# Altium PCB routed.PcbDoc
Units mil, origin at the board's own origin, x right, y up, seen from the top; angles counter-clockwise.
Board outline 1968.5 x 1181.1 mil, 2 copper layers (Top Layer, Bottom Layer); 4 components, 4 nets, 14 pads, 3 vias.
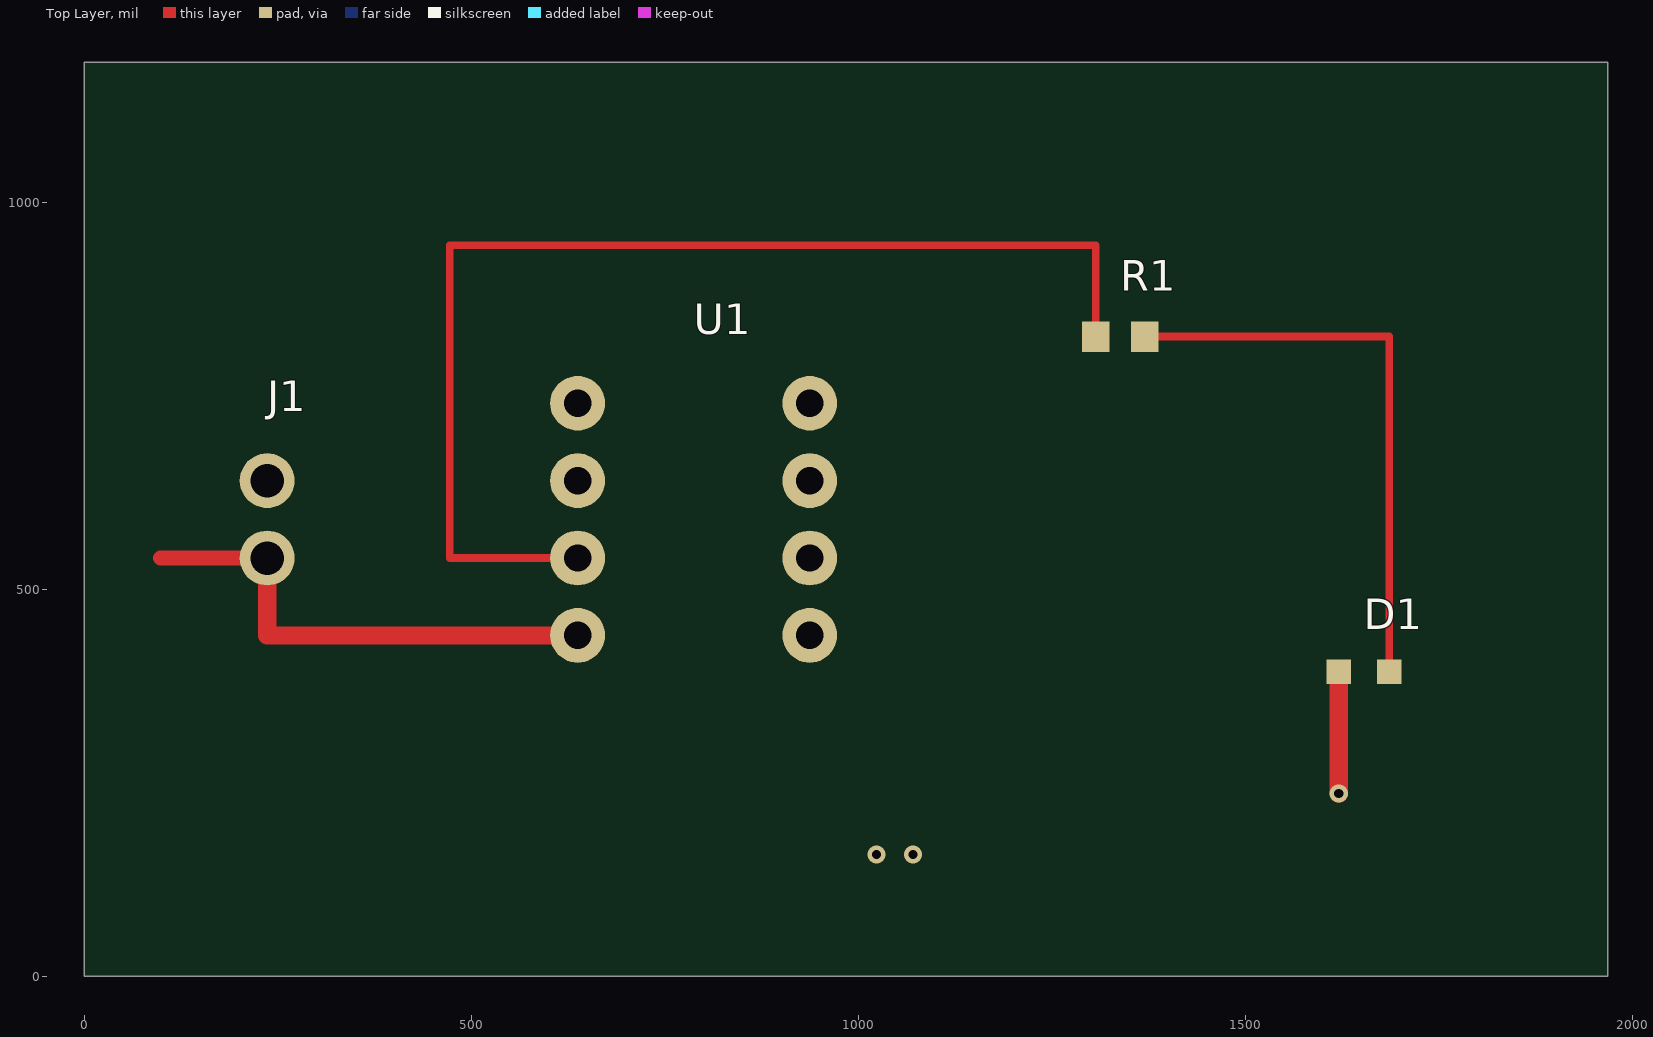
[diagram p0: Top Layer view]
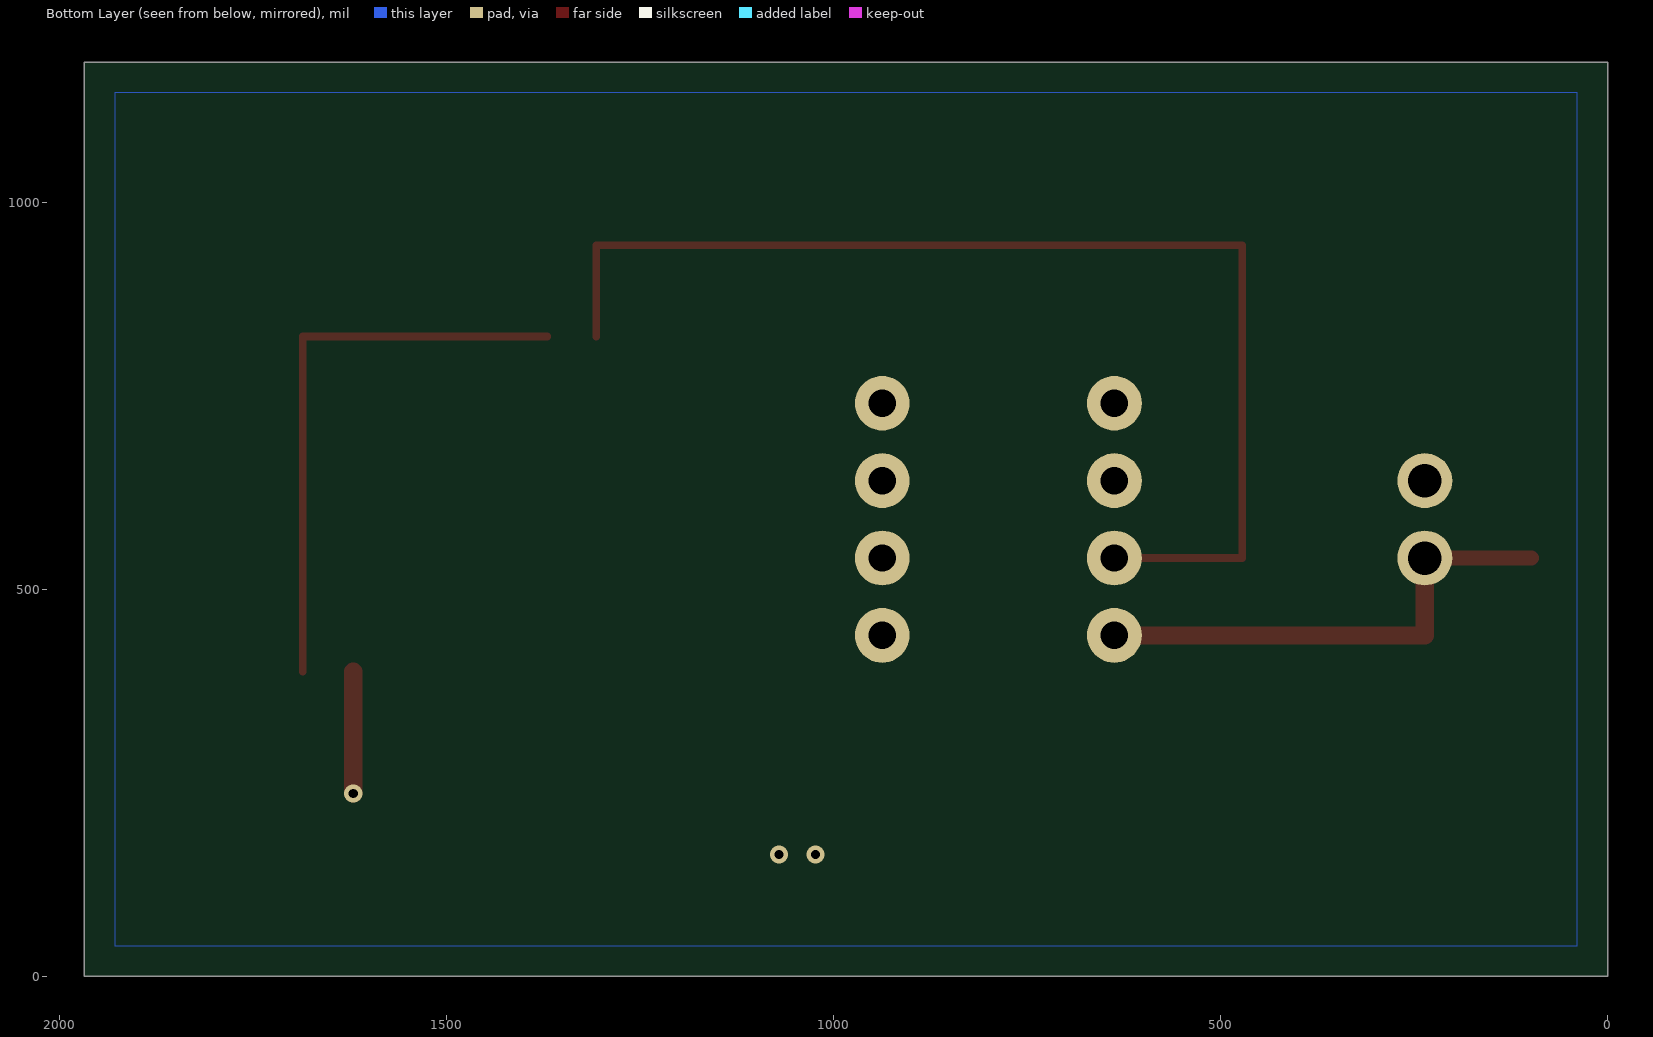
[diagram p1: Bottom Layer view, seen from below]

## Layer stack, top to bottom
Top Solder: solder mask 0.4, Solder Resist, Dk 3.5
Top Layer: signal copper 1.4
Dielectric 1: dielectric 12.6, FR-4, Dk 4.8
Bottom Layer: signal copper 1.4
Bottom Solder: solder mask 0.4, Solder Resist, Dk 3.5

## Board outline
0,1181.1 1968.5,1181.1 1968.5,0 0,0

## Design rules (kind name [scope] priority, off if disabled: settings)
Clearance Clearance_net_VIN_to_net_LED_A [InNet('VIN') vs InNet('LED_A')] p1: gap=59.06 ignorepadtopadclearanceinfootprint=FALSE
Clearance [All] p2: gap=5.91 ignorepadtopadclearanceinfootprint=FALSE
Clearance Clearance_PWR [InNetClass('PWR')] p3: gap=7.87 ignorepadtopadclearanceinfootprint=FALSE
RoutingVias [All] p1: holewidth=11.81 width=23.62 viastyle="Through Hole" minholewidth=11.81 minwidth=23.62 maxholewidth=11.81 maxwidth=23.62
Width Width_PWR [InNetClass('PWR')] p1: maxlimit=78.74 minlimit=23.62 preferedwidth=23.62
Width [All] p2: maxlimit=78.74 minlimit=5.91 preferedwidth=9.84

## Classes and differential pairs
net class PWR: GND VIN

## Components (designator, comment, footprint, x,y, rotation, side; value= is the part's Value field where it differs from the comment)
D1 "red" LED0603_Kingbright_APT1608SURCK 1653.54,393.7 r0 top
J1 "SUPPLY" Header_1x2_P2.54 236.22,590.55 r0 top
R1 "330" Chip_0603 1338.58,826.77 r0 top
U1 "MCU" DIP8_Microchip_P 787.4,590.55 r0 top locked

## Footprints (in the part's own frame and the unit in brackets; to place one, negate y for a bottom-side part, rotate by r counter-clockwise, add the part's x,y. Pads: shape width x height; smd on the part's side, far side on the other; paste and mask are expansions set on the pad)
Chip_0603 [mm]
  rect 0.9x1 smd: 1(-0.8,0) 2(0.8,0)
DIP8_Microchip_P [mm]
  round 1.8 hole 0.9: 1(-3.81,-3.81) 2(-3.81,-1.27) 3(-3.81,1.27) 4(-3.81,3.81) 5(3.81,3.81) 6(3.81,1.27) 7(3.81,-1.27) 8(3.81,-3.81)
Header_1x2_P2.54 [mm]
  round 1.8 hole 1.1: 1(0,-1.27) 2(0,1.27)
LED0603_Kingbright_APT1608SURCK [mm]
  rect 0.8x0.8 smd: 1(-0.825,0) 2(0.825,0)

## Part data
D1: library part LED
J1: library part Connector_2
R1: library part Resistor
U1: library part Microcontroller

## Via types
v1: diameter 23.62, hole 11.81, Top Layer to Bottom Layer, 3 vias

## Nets (pads, with @x,y where several pads share a name; then routed paths per layer and width w, separated by ;. In a path a pad name is that pad's centre, name@x,y a point inside that pad or via, vN(x,y) a via of type N, cw(c..) or ccw(c..) an arc to the next point about the centre after c; other vN are vias at no path point)
GND: D1.1 J1.2 U1.8 | length 157.5
  Top Layer w23.62: v1(1621.06,236.22) D1.1
LED_A: D1.2 R1.2 | length 749
  Top Layer w9.84: R1.2 1686.02,826.77 D1.2
  other v1: 1070.87,157.48
LED_DRV: R1.1 U1.2 | length 1522
  Top Layer w9.84: U1.2 472.44,540.55 472.44,944.88 1307.09,944.88 R1.1
VIN: J1.1 U1.1 | length 639
  Top Layer w19.68: 98.43,540.55 J1.1
  Top Layer w23.62: J1.1 236.22,440.55 U1.1
  other v1: 1023.62,157.48
pads on no net: U1.3 U1.4 U1.5 U1.6 U1.7

## Polygon pours and split planes (outlines as drawn)
GND on Bottom Layer "GND_L02_P000" (solid, remove dead copper, pour order 0): 39.37,1141.73 1929.13,1141.73 1929.13,39.37 39.37,39.37